# Altium PCB Sampler_DIOT.PCBDOC (part 4 of 9)
Units mm, origin at the board's own origin, x right, y up, seen from the top; angles counter-clockwise.
Board outline 222.17 x 100 mm, 4 copper layers (Top, GP1(GND), L3, Bot), stack 1.672 mm thick; 664 components, 411 nets, 2128 pads, 911 vias.
Unrouted connection lines stored in the file: 4.
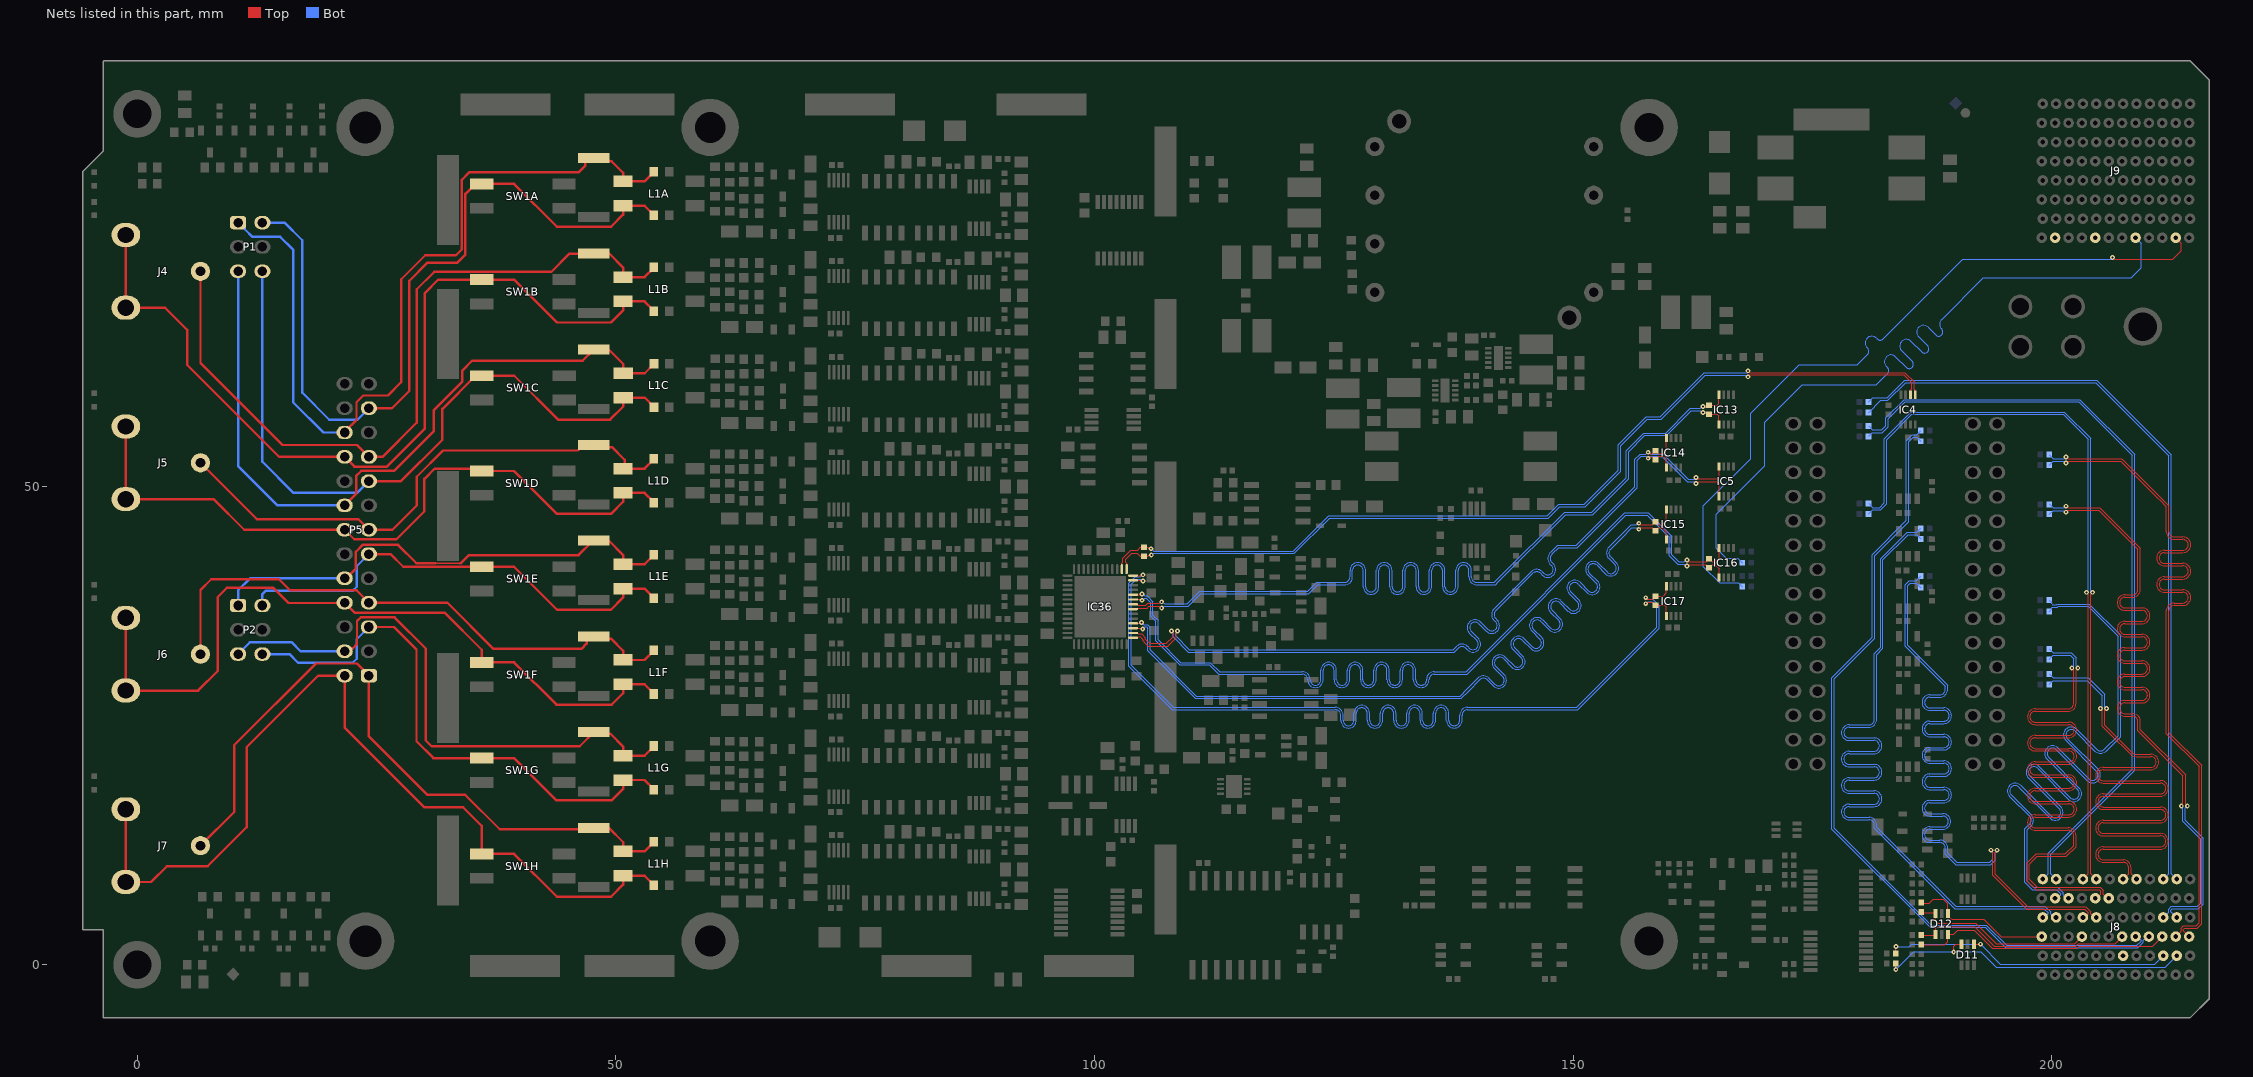
[diagram p5: the nets of this part, all layers, seen from the top]

## Part data (continued)
R101: library part R0402_220R_1%_0.0625W_100PPM, "Resistor - 1%", Case=0402, Manufacturer=GENERIC, Manufacturer1 ComponentHeight=0.4mm, Manufacturer1 Example="YAGEO PHYCOMP", Manufacturer1 Part Number=232270672201L, Power=0.0625W, Tolerance=±1%, Author="CERN DEM JLC", Component Type=Standard, CreateDate=03.12.2007, HelpURL=\\cern.ch\dfs\Applications\Altium\Datasheets\R0402_Phycomp_RC0402.pdf, LatestRevisionDate=17.10.2012, Manufacturer Part Number=R0402_220R_1%_0.0625W_100PPM, Mounted=Yes, Part Description="General Purpose Thick Film Chip Resistor", Part Number=R0402_220R_1%_0.0625W_100PPM, Pin Count=2, PressFit=No, Sense=No, SMD=Yes, Socket=No, Status="Not Recommended", TC=±100ppm/°C
R114: library part R0402_1K6_1%_0.0625W_100PPM, "Resistor - 1%", Case=0402, Manufacturer=GENERIC, Manufacturer1 ComponentHeight=0.4mm, Manufacturer1 Example="YAGEO PHYCOMP", Manufacturer1 Part Number=232270671602L, Power=0.0625W, Tolerance=±1%, Author="CERN DEM JLC", Component Type=Standard, CreateDate=03.12.2007, HelpURL=\\cern.ch\dfs\Applications\Altium\Datasheets\R0402_Phycomp_RC0402.pdf, LatestRevisionDate=17.10.2012, Manufacturer Part Number=R0402_1K6_1%_0.0625W_100PPM, Mounted=Yes, Part Description="General Purpose Thick Film Chip Resistor", Part Number=R0402_1K6_1%_0.0625W_100PPM, Pin Count=2, PressFit=No, Sense=No, SMD=Yes, Socket=No, Status="Not Recommended", TC=±100ppm/°C
R119: library part R0402_1K_1%_0.0625W_100PPM, "Resistor - 1%", Case=0402, Manufacturer=GENERIC, Manufacturer1 ComponentHeight=0.4mm, Manufacturer1 Example="YAGEO PHYCOMP", Manufacturer1 Part Number=232270671002L, Power=0.0625W, Tolerance=±1%, Author="CERN DEM JLC", Component Type=Standard, CreateDate=03.12.2007, HelpURL=\\cern.ch\dfs\Applications\Altium\Datasheets\R0402_Phycomp_RC0402.pdf, LatestRevisionDate=17.10.2012, Manufacturer Part Number=R0402_1K_1%_0.0625W_100PPM, Mounted=Yes, Part Description="General Purpose Thick Film Chip Resistor", Part Number=R0402_1K_1%_0.0625W_100PPM, Pin Count=2, PressFit=No, Sense=No, SMD=Yes, Socket=No, Status="Not Recommended", TC=±100ppm/°C
RN1A RN1B RN1C RN1D RN1E RN1F RN1G RN1H RN2A RN2B RN2C RN2D RN2E RN2F RN2G RN2H RN3 RN4: library part RN_10K_5K_VISHAY_AORN2-1AT3, "DIL8 Resistor Network 4 Resistors 10k-5k-5k-10k 0.1%", Case=SOIC8, Manufacturer="VISHAY DALE", Manufacturer Part Number=AORN2-1AT3, Power=4x0.1W, Tolerance=0.1%, Author="CERN DEM JLC", ComponentHeight=1.73mm, Component Type=Standard, CreateDate=20.02.2017, HelpURL=\\cern.ch\dfs\Applications\Altium\Datasheets\RN_VISHAY_AORN.pdf, LatestRevisionDate=20.02.2017, Mounted=Yes, Part Description="Dual-In-Line Thin Film Precision Automotive Resistors Network, (4 Isolated) - AORN Series", Part Number=RN_10K_5K_VISHAY_AORN2-1AT3, Pin Count=8, PressFit=No, Sense=No, SMD=Yes, Socket=No, TC=±25ppm/°C
SCREW1 SCREW2: library part BOSSARD_BN5687-3061606_v, "Screw", Manufacturer=BOSSARD, Manufacturer Part Number="BN5687 Art.3061606", Author="CERN DEM JLC", Component Type=Mechanical, ComponentHeight=2.4mm, CreateDate=07.02.2013, HelpURL=\\cern.ch\dfs\Applications\Altium\Datasheets\BOSSARD_BN5687-3061606.pdf, LatestRevisionDate=07.02.2013, Mounted=Yes, PackageDescription="M3 L=8mm Hexalobular Socket Pan Head Screw, Fully Threaded - Stainless Steel A2", Part Description="M3 L=8mm Hexalobular Socket Pan Head Screw, Fully Threaded, Stainless Steel A2", Part Number=BOSSARD_BN5687-3061606_v, Pin Count=0, PressFit=No, Sense=No, SMD=No, Socket=No, Status=None
Standoff1 Standoff2: library part SAMTEC_SO-1115-03-02-02-N, "Standoff Male-Female", Manufacturer=SAMTEC, Manufacturer Part Number=SO-1115-03-02-02-N, Author="CERN DEM BC", Component Type=Mechanical, ComponentHeight=11.15mm, CreateDate=21.07.2020, HelpURL=\\cern.ch\dfs\Applications\Altium\Datasheets\SAMTEC_SO-1115-03-02-02-N.pdf, LatestRevisionDate=21.07.2020, Mounted=Yes, PackageDescription="11.15mm Length, Precision Board Stacking Standoff M3 Male/Female", Part Description="11.15mm Length, Precision Board Stacking Standoff M3 Male/Female", Part Number=SAMTEC_SO-1115-03-02-02-N, Pin Count=1, PressFit=No, Sense=No, SMD=No, Socket=No, Status=None
SW1A SW1B SW1C SW1D SW1E SW1F SW1G SW1H: library part SW_CTS_204-121ST, "2x SPST DIP Switch 1NO + 1NF", Manufacturer=CTS, Manufacturer Part Number=204-121ST, Author="CERN DEM JLC", ComponentHeight=10.36mm, Component Type=Standard, CreateDate=28.08.2014, Family=Switch, HelpURL=\\cern.ch\dfs\Applications\Altium\Datasheets\SW_CTS_204-121ST.pdf, LatestRevisionDate=28.08.2014, Mounted=Yes, PackageDescription="Body 7.26 x 9.78mm, 2x SPST DIP, 1NO + 1NF Switch, CTS 204 Series", Part Description="Coupled SPST DIP Switch, 1NO + 1NF, CTS 204 Series", Part Number=SW_CTS_204-121ST, Pin Count=4, PressFit=No, Sense=No, SMD=Yes, Socket=No, Status=None
T10 T11: "N-CHANNEL MOSFET WITH DIODE", Case=SOT23-3, Manufacturer="ON SEMICONDUCTOR", Manufacturer Part Number=BSS138L, Author="CERN DEM JLC", Bonding=No, Component Type=Standard, ComponentHeight=1.11mm, CreateDate=23.03.2009, Device=BSS138LT1G, HelpURL=\\cern.ch\dfs\Applications\Altium\Datasheets\BSS138LT1G.pdf, LatestRevisionDate=25.05.2022, Mounted=Yes, PackageDescription="SOT23, 0.95mm Pitch; 3 Pin, 1.40mm W X 3.00mm L X 1.10mm H body, IPC Medium Density", Part Description="50V, 200mA N-Channel Enhancement Mode Field-Effect Transistor", Part Number=BSS138LT1G, Pin Count=3, PressFit=No, Sense=No, SMD=Yes, Socket=No
TP7 TP8 TP9 TP10 TP11 TP12 TP13: library part SMD_PAD_1.27X1.27MM, Author="CERN DEM JLC", ComponentHeight=0mm, Component Type="Standard (No BOM)", CreateDate=12.01.2008, Family="Test Point", HelpURL=Undefined, LatestRevisionDate=12.01.2008, Mounted=No, PackageDescription="1.27mm x 1.27mm PCB Copper Area (SMD Test Point)", Part Description="1.27mm x 1.27mm PCB Copper Area (SMD Test Point)", Part Number=SMD_PAD_1.27X1.27MM, Pin Count=1, Sense=No, SMD=Yes, Socket=No, Status=None
TP14 TP15: library part SMD_PAD_1.27X1.27MM, "Test Point", Author="CERN DEM JLC", Component Type="Standard (No BOM)", ComponentHeight=0mm, CreateDate=12.01.2008, Family="Test Point", HelpURL=Undefined, LatestRevisionDate=12.01.2008, Mounted=No, PackageDescription="1.27mm x 1.27mm PCB Copper Area (SMD Test Point)", Part Description="1.27mm x 1.27mm PCB Copper Area (SMD Test Point)", Part Number=SMD_PAD_1.27X1.27MM, Pin Count=1, Sense=No, SMD=Yes, Socket=No, Status=None
WASHER1 WASHER2 WASHER3 WASHER4: library part BOSSARD_BN678-1250191_v, "Washer", Manufacturer=BOSSARD, Manufacturer Part Number="BN678 Art.1250191", Author="CERN DEM JLC", Component Type=Mechanical, ComponentHeight=0.5mm, CreateDate=15.01.2013, HelpURL=\\cern.ch\dfs\Applications\Altium\Datasheets\BOSSARD_BN678-1250191.pdf, LatestRevisionDate=11.12.2013, Mounted=Yes, PackageDescription="Waved Spring Washer for M3 Screw, Stainless Steel A2 / 1.4310", Part Description="Waved Spring Washer for M3 Screw, Stainless Steel A2 / 1.4310", Part Number=BOSSARD_BN678-1250191_v, Pin Count=0, PressFit=No, Sense=No, SMD=No, Socket=No, Status=Obsolete, Status Comment="Replaced by BOSSARD_BN83728-8243964_v"

## Free pads (board coordinates)
  round 6 hole 3.2: MH(59.844,2.48) MH(59.844,87.48)

## Via types
v1: diameter 0.5, hole 0.2, Top to Bot, tented both sides, 878 vias
v2: diameter 1, hole 0.6, Top to Bot, tented both sides, 18 vias
v3: diameter 0.6, hole 0.3, Top to Bot, tented both sides, 13 vias
v4: diameter 1.27, hole 0.711, Top to Bot, tented both sides, 2 vias

## Nets (pads, with @x,y where several pads share a name; then routed paths per layer and width w, separated by ;. In a path a pad name is that pad's centre, name@x,y a point inside that pad or via, vN(x,y) a via of type N, cw(c..) or ccw(c..) an arc to the next point about the centre after c; other vN are vias at no path point)
ADC_CLKOUT_N: IC13.8 IC36.34 R20.2 | length 95.4
  Top w0.127: IC36.34@104.039,37.665 104.465,37.665 104.563,37.568 105.366,37.568 105.546,37.748 106.756,37.748 106.93,37.921 v1(107.019,37.921) ; v1(163.569,58.318) 164.054,58.318 R20.2@164.21,58.474 165.069,58.474 165.229,58.634 IC13.8@165.229,59.529
  Bot w0.127: v1(107.019,37.921) 107.108,37.921 107.33,37.7 109.691,37.7 111.013,39.023 122.274,39.023 123.206,39.954 125.944,39.954 126.135,39.954 ccw(c126.135,40.518) 126.698,40.518 126.698,41.199 cw(c127.516,41.199) 127.516,42.016 cw(c127.516,41.199) 128.333,41.199 128.333,39.518 ccw(c128.897,39.518) 128.897,38.954 ccw(c128.897,39.518) 129.46,39.518 129.46,41.199 cw(c130.278,41.199) 130.278,42.016 cw(c130.278,41.199) 131.095,41.199 131.095,39.518 ccw(c131.659,39.518) 131.659,38.954 ccw(c131.659,39.518) 132.222,39.518 132.222,41.199 cw(c133.04,41.199) 133.04,42.016 cw(c133.04,41.199) 133.857,41.199 133.857,39.518 ccw(c134.421,39.518) 134.421,38.954 ccw(c134.421,39.518) 134.984,39.518 134.984,41.199 cw(c135.802,41.199) 135.802,42.016 cw(c135.802,41.199) 136.619,41.199 136.619,39.518 ccw(c137.183,39.518) 137.183,38.954 ccw(c137.183,39.518) 137.746,39.518 137.746,41.199 cw(c138.564,41.199) 138.564,42.016 cw(c138.564,41.199) 139.381,41.199 139.381,40.518 ccw(c139.945,40.518) 139.945,39.954 141.795,39.954 142.15,40.309 149.112,47.271 151.937,47.271 155.571,50.905 155.571,53.73 157.395,55.554 159.67,55.554 162.245,58.129 163.304,58.129 163.493,58.318 v1(163.569,58.318)
ADC_CLKOUT_P: IC13.1 IC36.33 R20.1 | length 95.4
  Top w0.127: IC36.33@104.039,37.165 104.465,37.165 104.563,37.263 105.492,37.263 105.672,37.443 106.756,37.443 106.93,37.269 v1(107.019,37.269) ; v1(163.569,57.691) 164.054,57.691 R20.1@164.21,57.534 165.054,57.534 165.25,57.338 IC13.1@165.25,56.45
  Bot w0.127: v1(107.019,37.269) 107.108,37.269 107.285,37.446 109.796,37.446 111.119,38.769 122.38,38.769 123.311,39.7 125.944,39.7 126.135,39.7 ccw(c126.135,40.518) 126.952,40.518 126.952,41.199 cw(c127.516,41.199) 127.516,41.762 cw(c127.516,41.199) 128.079,41.199 128.079,39.518 ccw(c128.897,39.518) 128.897,38.7 ccw(c128.897,39.518) 129.714,39.518 129.714,41.199 cw(c130.278,41.199) 130.278,41.762 cw(c130.278,41.199) 130.841,41.199 130.841,39.518 ccw(c131.659,39.518) 131.659,38.7 ccw(c131.659,39.518) 132.476,39.518 132.476,41.199 cw(c133.04,41.199) 133.04,41.762 cw(c133.04,41.199) 133.603,41.199 133.603,39.518 ccw(c134.421,39.518) 134.421,38.7 ccw(c134.421,39.518) 135.238,39.518 135.238,41.199 cw(c135.802,41.199) 135.802,41.762 cw(c135.802,41.199) 136.365,41.199 136.365,39.518 ccw(c137.183,39.518) 137.183,38.7 ccw(c137.183,39.518) 138,39.518 138,41.199 cw(c138.564,41.199) 138.564,41.762 cw(c138.564,41.199) 139.127,41.199 139.127,40.518 ccw(c139.945,40.518) 139.945,39.7 141.9,39.7 142.15,39.95 149.217,47.017 152.042,47.017 155.825,50.8 155.825,53.625 157.5,55.3 159.775,55.3 162.35,57.875 163.308,57.875 163.493,57.691 v1(163.569,57.691)
ADC_IN_N0: L1A.2 P1.2 P5.23 R8A.1 SW1A.1 | length 83.1
  Top w0.254: P5.23@24.2,58.15 26.6,58.15 28.419,59.969 28.419,71.463 30.316,73.36 33.44,73.36 34.276,74.196 34.276,80.535 35.331,81.59 39.366,81.59 43.826,77.13 49.517,77.13 50.76,78.373 L1A.2@50.76,79.304 52.998,79.304 53.964,78.338 R8A.1@53.964,78.288
  Bot w0.254: P1.2@13.07,77.54 15.377,77.54 17.225,75.692 17.225,59.775 20.05,56.95 23,56.95 P5.23@24.2,58.15
ADC_IN_N1: J4.2 L1B.2 P5.20 R8B.1 SW1B.1 | length 91.9
  Top w0.254: J4.2@-1.2,76.25 J4.2@-1.2,68.65 2.902,68.65 5.207,66.345 5.207,62.687 14.824,53.07 P5.20@21.66,53.07 22.68,52.05 26.075,52.05 30.044,56.019 30.044,70.18 31.444,71.58 35.403,71.58 35.413,71.59 39.366,71.59 43.851,67.105 49.492,67.105 50.76,68.373 L1B.2@50.76,69.304 52.998,69.304 53.964,68.338 R8B.1@53.964,68.288
ADC_IN_N2: L1C.2 P1.6 P5.17 R8C.1 SW1C.1 | length 73
  Top w0.254: P5.17@24.2,50.53 27.545,50.53 31.869,54.854 31.869,58.071 35.344,61.546 39.379,61.546 43.97,56.955 49.398,56.955 50.773,58.329 L1C.2@50.773,59.26 53.011,59.26 53.977,58.294 R8C.1@53.977,58.244
  Bot w0.254: P1.6@13.07,72.46 13.07,52.555 16.325,49.3 22.97,49.3 P5.17@24.2,50.53
ADC_IN_N3: J5.2 L1D.2 P5.14 R8D.1 SW1D.1 | length 73.4
  Top w0.246: 31.185,51.83 33.703,51.83
  Top w0.254: J5.2@-1.2,56.25 J5.2@-1.2,48.65 7.967,48.65 11.167,45.45 21.671,45.45 22.663,44.458 27.072,44.458 29.992,47.378 29.992,50.765 31.057,51.83 31.185,51.83 ; 33.703,51.83 35.173,51.83 35.413,51.59 39.366,51.59 43.851,47.105 49.492,47.105 50.76,48.373 L1D.2@50.76,49.304 52.998,49.304 53.964,48.338 R8D.1@53.964,48.288
ADC_IN_N4: L1E.2 P2.2 P5.11 R8E.1 SW1E.1 | length 49.4
  Top w0.254: P5.11@24.2,42.91 26.465,42.91 27.785,41.59 SW1E.1@35.986,41.59 39.366,41.59 43.876,37.08 49.467,37.08 50.76,38.373 L1E.2@50.76,39.304 52.998,39.304 53.964,38.338 R8E.1@53.964,38.288
  Bot w0.254: P2.2@13.07,37.54 13.07,38.72 13.45,39.1 22.525,39.1 22.925,39.5 22.925,41.635 P5.11@24.2,42.91
ADC_IN_N5: J6.2 L1F.2 P5.8 R8F.1 SW1F.1 | length 79.5
  Top w0.254: J6.2@-1.2,36.25 J6.2@-1.2,28.65 6.352,28.65 8.4,30.698 8.4,38.425 9.35,39.375 14.213,39.375 15.788,37.8 21.63,37.8 P5.8@21.66,37.83 22.69,36.8 32.099,36.8 35.986,32.913 SW1F.1@35.986,31.59 39.366,31.59 43.776,27.18 49.567,27.18 50.76,28.373 L1F.2@50.76,29.304 52.998,29.304 53.964,28.338 R8F.1@53.964,28.288
ADC_IN_N6: L1G.2 P2.6 P5.5 R8G.1 SW1G.1 | length 59.5
  Top w0.254: P5.5@23.7,35.29 26.835,35.29 29.17,32.955 29.17,23.355 30.935,21.59 39.366,21.59 43.751,17.205 49.592,17.205 50.76,18.373 L1G.2@50.76,19.304 52.998,19.304 53.964,18.338 R8G.1@53.964,18.288
  Bot w0.254: P2.6@13.07,32.46 15.89,32.46 16.8,31.55 22.5,31.55 22.925,31.975 22.925,34.015 P5.5@24.2,35.29
ADC_IN_N7: J7.2 L1H.2 P5.2 R8H.1 SW1H.1 | length 92.9
  Top w0.254: J7.2@-1.2,16.25 J7.2@-1.2,8.65 1.436,8.65 3.086,10.3 7.35,10.3 11.425,14.375 11.425,22.725 18.91,30.21 P5.2@21.66,30.21 21.66,24.79 30,16.45 34.05,16.45 35.986,14.514 SW1H.1@35.986,11.59 39.366,11.59 43.826,7.13 49.517,7.13 50.76,8.373 L1H.2@50.76,9.304 52.998,9.304 53.964,8.338 R8H.1@53.964,8.288
ADC_IN_P0: L1A.1 P1.1 P5.22 R1A.1 R5A.2 | length 87.8
  Top w0.254: P5.22@21.66,55.61 21.66,55.688 22.899,56.927 22.899,58.773 23.602,59.476 26.179,59.476 27.581,60.878 27.581,71.629 30.081,74.129 33.291,74.129 33.895,74.733 33.895,82.01 34.67,82.785 46.102,82.785 46.814,83.497 46.814,83.907 47.212,84.305 49.019,84.305 49.199,84.125 49.199,83.973 49.217,83.954 49.549,83.954 50.76,82.743 L1A.1@50.76,81.844 52.998,81.844 53.964,82.81 R1A.1@53.964,82.86
  Bot w0.254: P1.1@10.53,77.54 10.559,77.54 11.218,76.881 11.218,76.852 12.02,76.05 14.94,76.05 16.275,74.715 16.275,58.775 19.44,55.61 P5.22@21.66,55.61
ADC_IN_P1: J4.1 L1B.1 P5.19 R1B.1 R5B.2 | length 80.1
  Top w0.254: J4.1@6.6,72.45 6.6,62.875 15.17,54.305 22.965,54.305 P5.19@24.2,53.07 25.63,53.07 29.2,56.64 29.2,70.575 31.034,72.409 43.258,72.409 45.154,74.305 47.544,74.305 47.619,74.23 R5B.2@47.694,74.305 49.302,74.305 50.76,72.847 L1B.1@50.76,71.844 52.998,71.844 53.964,72.81 R1B.1@53.964,72.86
ADC_IN_P2: L1C.1 P1.5 P5.16 R1C.1 R5C.2 | length 77.3
  Top w0.254: P5.16@21.66,47.99 22.863,49.193 22.863,51.063 23.4,51.6 26.833,51.6 30.95,55.717 30.95,57.922 33.958,60.93 33.958,62.089 34.974,63.105 46.529,63.105 47.654,64.23 47.665,64.219 R5C.2@47.707,64.261 49.271,64.261 50.769,62.763 50.769,61.804 L1C.1@50.773,61.8 53.011,61.8 53.977,62.766 R1C.1@53.977,62.816
  Bot w0.254: P1.5@10.53,72.46 10.53,52.12 14.66,47.99 P5.16@21.66,47.99
ADC_IN_P3: J5.1 L1D.1 P5.13 R1D.1 R5D.2 | length 57.9
  Top w0.254: J5.1@6.6,52.45 12.5,46.55 23.1,46.55 P5.13@24.2,45.45 26.653,45.45 29.2,47.997 29.2,50.986 31.944,53.73 46.022,53.73 46.171,53.879 46.171,53.907 46.569,54.305 R5D.2@47.694,54.305 47.913,54.086 49.576,54.086 50.919,52.743 50.919,52.003 L1D.1@50.76,51.844 52.998,51.844 53.964,52.81 R1D.1@53.964,52.86
ADC_IN_P4: L1E.1 P2.1 P5.10 R1E.1 R5E.2 | length 51.8
  Top w0.165: 31.144,41.971 33.744,41.971
  Top w0.254: P5.10@21.66,40.37 21.795,40.37 22.83,41.405 22.83,43.156 23.538,43.864 27.246,43.864 29.139,41.971 31.144,41.971 ; 33.744,41.971 33.807,41.971 34.643,42.807 46.112,42.807 47.61,44.305 47.652,44.263 R5E.2@47.694,44.305 49.262,44.305 50.76,42.807 L1E.1@50.76,41.844 52.998,41.844 53.964,42.81 R1E.1@53.964,42.86
  Bot w0.254: P2.1@10.53,37.54 10.53,39.13 11.77,40.37 P5.10@21.66,40.37
ADC_IN_P5: J6.1 L1F.1 P5.7 R1F.1 R5F.2 | length 60.3
  Top w0.254: J6.1@6.6,32.45 6.6,39.15 7.725,40.275 14.8,40.275 15.95,39.125 22.905,39.125 P5.7@24.2,37.83 32.395,37.83 37.217,33.008 46.397,33.008 46.937,33.548 46.937,33.907 47.335,34.305 47.514,34.305 47.776,34.043 49.524,34.043 50.76,32.807 L1F.1@50.76,31.844 52.998,31.844 53.964,32.81 R1F.1@53.964,32.86
ADC_IN_P6: L1G.1 P2.5 P5.4 R1G.1 R5G.2 | length 60.9
  Top w0.254: P5.4@21.66,32.75 22.12,32.75 22.435,33.065 22.516,33.065 22.95,33.5 22.95,35.9 23.35,36.3 26.875,36.3 30.13,33.045 30.13,23.445 30.739,22.836 46.225,22.836 R5G.2@47.694,24.305 ; R5G.2@47.669,24.142 49.425,24.142 50.76,22.807 50.76,21.978 50.894,21.844 52.998,21.844 53.964,22.81 R1G.1@53.964,22.86
  Bot w0.254: P2.5@10.53,32.46 11.745,33.675 16.15,33.675 17.075,32.75 P5.4@21.66,32.75
ADC_IN_P7: J7.1 L1H.1 P5.1 R1H.1 R5H.2 | length 72.3
  Top w0.254: J7.1@6.6,12.45 10.125,15.975 10.125,22.95 18.65,31.475 22.935,31.475 23.615,30.795 23.615,30.766 24.171,30.21 P5.1@24.2,30.21 24.2,23.85 30.3,17.75 34.266,17.75 37.861,14.155 R5H.2@47.694,14.155 ; R5H.2@47.694,14.305 49.271,14.305 50.769,12.807 50.769,11.853 L1H.1@50.76,11.844 52.998,11.844 53.964,12.81 R1H.1@53.964,12.86
ADC_SCK_N: IC4.5 IC36.42 R79.1 | length 95.8
  Top w0.127: IC36.42@102.864,41.34 102.864,41.942 102.962,42.039 102.962,42.492 103.778,43.308 104.516,43.308 104.808,43.6 R79.1@105.194,43.6 105.58,43.6 105.711,43.469 v1(105.917,43.469) ; v1(168.275,62.052) 168.448,61.879 177.351,61.879 184.671,61.879 185.654,60.896 185.654,60.134 185.75,60.039 IC4.5@185.75,59.55
  Bot w0.127: v1(105.917,43.469) 105.979,43.469 106.219,43.229 120.769,43.229 124.469,46.929 147.295,46.929 148.486,48.12 151.161,48.12 154.721,51.68 154.721,54.355 157.641,57.275 159.1,57.275 160.825,59 163.691,61.865 168.275,61.865 v1(168.275,62.052)
ADC_SCK_P: IC4.6 IC36.41 R79.2 | length 94.9
  Top w0.127: IC36.41@103.364,41.34 103.364,41.942 103.266,42.039 103.266,42.365 103.904,43.003 104.465,43.003 104.808,42.66 R79.2@105.194,42.66 105.58,42.66 105.737,42.817 v1(105.944,42.817) ; v1(168.275,61.425) 168.275,61.611 168.457,61.611 168.471,61.625 177.246,61.625 184.566,61.625 185.4,60.791 185.4,60.189 185.25,60.039 IC4.6@185.25,59.55
  Bot w0.127: v1(105.944,42.817) 106.006,42.817 106.164,42.975 120.874,42.975 124.574,46.675 147.4,46.675 148.591,47.866 151.266,47.866 154.975,51.575 154.975,54.25 157.746,57.021 159.205,57.021 163.796,61.611 168.089,61.611 v1(168.275,61.425)
ADC_SDOA_N: IC5.1 IC14.1 IC36.28 R21.1 | length 88.2
  Top w0.127: IC36.28@104.039,34.665 104.465,34.665 104.563,34.568 104.919,34.568 105.326,34.161 105.326,34.018 105.764,33.58 107.52,33.58 108.219,34.279 108.219,34.68 108.058,34.841 v1(108.058,34.879) ; v1(157.85,52.923) 158.025,53.098 158.282,53.098 R21.1@158.6,52.78 158.929,53.109 159.44,53.109 159.75,52.8 IC14.1@159.75,51.95 ; v1(162.85,50.275) 162.85,50.411 163.054,50.411 163.108,50.465 165.089,50.465 165.255,50.299 165.255,48.955 IC5.1@165.25,48.95
  Bot w0.127: v1(108.058,34.879) 108.058,34.804 108.244,34.618 108.244,34.249 109.822,32.671 137.024,32.671 137.596,32.671 138.005,33.08 cw(c138.403,32.681) 138.802,33.079 138.972,32.91 ccw(c139.55,33.488) 140.128,32.91 ccw(c139.55,33.488) 140.128,34.066 139.361,34.833 cw(c139.759,35.231) 139.361,35.63 cw(c139.759,35.231) 140.158,35.63 140.925,34.863 ccw(c141.503,35.441) 142.081,34.863 ccw(c141.503,35.441) 142.081,36.019 141.911,36.189 cw(c142.309,36.587) 141.911,36.986 145.817,40.892 cw(c146.215,40.493) 146.614,40.891 146.784,40.722 ccw(c147.362,41.3) 147.94,40.722 ccw(c147.362,41.3) 147.94,41.878 147.77,42.048 cw(c148.168,42.446) 147.77,42.845 147.905,42.98 148.52,43.595 150.445,43.595 156.7,49.85 156.7,52.7 157.11,53.11 157.589,53.11 157.776,52.923 v1(157.85,52.923) 157.927,52.923 157.927,52.925 158.111,53.11 159.093,53.11 159.1,53.103 159.297,53.103 161.939,50.461 162.663,50.461 v1(162.85,50.275)
ADC_SDOA_P: IC5.8 IC14.8 IC36.27 R21.2 | length 88.5
  Top w0.127: IC36.27@104.039,34.165 104.465,34.165 104.563,34.263 104.793,34.263 105.021,34.035 105.021,33.892 105.258,33.655 105.638,33.275 107.646,33.275 108.524,34.153 108.524,34.68 108.685,34.841 v1(108.685,34.879) ; v1(157.85,53.55) 157.998,53.402 158.282,53.402 R21.2@158.6,53.72 158.906,53.414 159.434,53.414 159.75,53.73 IC14.8@159.75,55.05 ; v1(162.85,50.902) 162.982,50.77 165.089,50.77 165.255,50.936 165.255,52.045 IC5.8@165.25,52.05
  Bot w0.127: v1(108.685,34.879) 108.685,34.804 108.498,34.618 108.498,34.354 109.927,32.925 136.77,32.925 137.491,32.925 137.825,33.259 cw(c138.403,32.681) 138.941,33.296 138.944,33.296 138.98,33.26 cw(c138.403,32.681) 138.981,33.259 139.151,33.089 ccw(c139.55,33.488) 139.948,33.089 ccw(c139.55,33.488) 139.948,33.886 139.181,34.653 cw(c139.759,35.231) 139.181,35.809 cw(c139.759,35.231) 140.337,35.809 141.104,35.042 ccw(c141.503,35.441) 141.901,35.042 ccw(c141.503,35.441) 141.901,35.839 141.731,36.009 cw(c142.309,36.587) 141.731,37.165 145.637,41.071 cw(c146.215,40.493) 146.754,41.109 146.756,41.109 146.792,41.072 cw(c146.215,40.493) 146.793,41.071 146.963,40.901 ccw(c147.362,41.3) 147.76,40.901 ccw(c147.362,41.3) 147.76,41.698 147.59,41.868 cw(c148.168,42.446) 147.59,43.024 147.725,43.159 148.414,43.849 150.339,43.849 156.446,49.955 156.446,52.805 157.004,53.364 157.589,53.364 157.776,53.55 v1(157.85,53.55) 157.927,53.55 157.927,53.548 158.111,53.364 159.198,53.364 159.205,53.357 159.402,53.357 162.044,50.715 162.85,50.715 v1(162.85,50.902)
ADC_SDOB_N: IC15.8 IC36.30 R22.2 | length 97
  Top w0.127: IC36.30@104.039,35.665 104.968,35.665 104.924,35.709 v1(104.924,35.757) ; v1(156.875,46.133) 157.036,45.972 158.282,45.972 R22.2@158.6,46.29 158.918,45.972 159.322,45.972 159.75,46.4 IC15.8@159.75,47.55
  Bot w0.127: v1(104.924,35.757) 105.131,35.55 105.549,35.55 105.829,35.27 105.829,32.896 110.644,28.081 138.206,28.081 138.953,28.828 140.064,29.939 cw(c140.642,29.361) 141.18,29.976 141.183,29.976 141.219,29.94 cw(c140.642,29.361) 141.22,29.939 141.839,29.32 ccw(c142.237,29.719) 142.636,29.32 ccw(c142.237,29.719) 142.636,30.117 141.775,30.978 cw(c142.353,31.556) 141.775,32.134 cw(c142.353,31.556) 142.931,32.134 143.792,31.273 ccw(c144.19,31.672) 144.589,31.273 ccw(c144.19,31.672) 144.589,32.07 143.728,32.931 cw(c144.306,33.509) 143.728,34.087 cw(c144.306,33.509) 144.884,34.087 145.745,33.226 ccw(c146.143,33.625) 146.542,33.226 ccw(c146.143,33.625) 146.542,34.023 145.681,34.884 cw(c146.259,35.462) 145.681,36.04 cw(c146.259,35.462) 146.837,36.04 147.698,35.179 ccw(c148.096,35.578) 148.495,35.179 ccw(c148.096,35.578) 148.495,35.976 147.634,36.837 cw(c148.212,37.415) 147.634,37.993 cw(c148.212,37.415) 148.79,37.993 149.651,37.132 ccw(c150.049,37.531) 150.448,37.132 ccw(c150.049,37.531) 150.448,37.929 149.587,38.79 cw(c150.165,39.368) 149.587,39.946 cw(c150.165,39.368) 150.743,39.946 151.604,39.085 ccw(c152.002,39.484) 152.401,39.882 151.54,40.743 cw(c152.118,41.321) 151.54,41.899 cw(c152.118,41.321) 152.696,41.899 153.557,41.038 ccw(c153.955,41.437) 154.354,41.038 ccw(c153.955,41.437) 154.354,41.835 153.735,42.454 cw(c154.313,43.032) 153.735,43.61 154.938,44.812 156.097,45.972 156.614,45.972 156.775,46.133 v1(156.875,46.133)
ADC_SDOB_P: IC15.1 IC36.29 R22.1 | length 96.5
  Top w0.127: IC36.29@104.039,35.165 104.968,35.165 v1(105.044,35.089) ; v1(156.875,45.506) 157.036,45.668 158.282,45.668 R22.1@158.6,45.35 158.918,45.668 159.333,45.668 159.75,45.25 IC15.1@159.75,44.45
  Bot w0.127: v1(105.044,35.089) 105.251,35.296 105.444,35.296 105.575,35.165 105.575,32.791 110.539,27.827 138.311,27.827 139.132,28.648 140.244,29.759 cw(c140.642,29.361) 141.041,29.759 ; 141.041,29.759 141.659,29.141 ccw(c142.237,29.719) 142.815,29.141 ccw(c142.237,29.719) 142.815,30.297 141.954,31.158 cw(c142.353,31.556) 141.954,31.955 cw(c142.353,31.556) 142.751,31.955 143.612,31.094 ccw(c144.19,31.672) 144.768,31.094 ccw(c144.19,31.672) 144.768,32.25 143.907,33.111 cw(c144.306,33.509) 143.907,33.908 cw(c144.306,33.509) 144.704,33.908 145.565,33.047 ccw(c146.143,33.625) 146.721,33.047 ccw(c146.143,33.625) 146.721,34.203 145.86,35.064 cw(c146.259,35.462) 145.86,35.861 cw(c146.259,35.462) 146.657,35.861 147.518,35 ccw(c148.096,35.578) 148.674,35 ccw(c148.096,35.578) 148.674,36.156 147.813,37.017 ; 147.813,37.017 cw(c148.212,37.415) 147.813,37.814 cw(c148.212,37.415) 148.61,37.814 149.471,36.953 ccw(c150.049,37.531) 150.627,36.953 ccw(c150.049,37.531) 150.627,38.109 149.766,38.97 cw(c150.165,39.368) 149.766,39.767 cw(c150.165,39.368) 150.563,39.767 151.424,38.906 ccw(c152.002,39.484) 152.58,38.906 ccw(c152.002,39.484) 152.58,40.062 151.719,40.923 cw(c152.118,41.321) 151.719,41.72 cw(c152.118,41.321) 152.516,41.72 153.377,40.859 ccw(c153.955,41.437) 154.533,40.859 ccw(c153.955,41.437) 154.533,42.015 153.915,42.634 cw(c154.313,43.032) 153.915,43.43 155.117,44.633 156.152,45.668 156.614,45.668 156.775,45.506 v1(156.875,45.506)
ADC_SDOC_N: IC16.8 IC36.36 R23.2 | length 94.3
  Top w0.127: IC36.36@104.039,38.665 104.893,38.665 v1(104.969,38.742) ; v1(161.9,42.279) 162.061,42.118 163.909,42.118 R23.2@164.226,42.435 164.544,42.118 164.8,42.118 165.25,42.568 IC16.8@165.25,43.55
  Bot w0.127: v1(104.969,38.742) 105.031,38.742 105.23,38.542 105.498,38.542 106.113,37.928 106.113,36.512 106.643,35.982 106.643,33.943 109.007,31.579 112.118,31.579 113.073,30.625 120.136,30.625 121.707,30.625 cw(c121.707,29.807) 122.525,29.807 122.525,29.78 ccw(c123.088,29.78) 123.088,29.216 ccw(c123.088,29.78) 123.652,29.78 123.652,30.782 cw(c124.469,30.782) 124.469,31.599 cw(c124.469,30.782) 125.287,30.782 125.287,29.78 ccw(c125.85,29.78) 125.85,29.216 ccw(c125.85,29.78) 126.414,29.78 126.414,30.782 cw(c127.231,30.782) 127.231,31.599 cw(c127.231,30.782) 128.049,30.782 128.049,29.78 ccw(c128.612,29.78) 128.612,29.216 ccw(c128.612,29.78) 129.176,29.78 129.176,30.782 cw(c129.993,30.782) 129.993,31.599 cw(c129.993,30.782) 130.811,30.782 130.811,29.78 ccw(c131.374,29.78) 131.374,29.216 ccw(c131.374,29.78) 131.938,29.78 131.938,30.782 cw(c132.755,30.782) 132.755,31.599 cw(c132.755,30.782) 133.573,30.782 133.573,29.78 ccw(c134.136,29.78) 134.136,29.216 ccw(c134.136,29.78) 134.7,29.78 134.7,29.807 cw(c135.517,29.807) 135.517,30.625 137.375,30.625 138.826,30.625 155.407,47.205 157.854,47.205 160.302,44.757 160.302,42.857 161.067,42.092 161.639,42.092 161.826,42.279 v1(161.9,42.279)
ADC_SDOC_P: IC16.1 IC36.35 R23.1 | length 94.2
  Top w0.127: IC36.35@104.039,38.165 104.64,38.165 104.649,38.174 104.884,38.174 v1(104.969,38.089) ; v1(161.9,41.652) 162.061,41.813 163.909,41.813 R23.1@164.226,41.495 164.544,41.813 164.8,41.813 165.25,41.362 IC16.1@165.25,40.45
  Bot w0.127: v1(104.969,38.089) 105.031,38.089 105.23,38.288 105.393,38.288 105.859,37.823 105.859,36.407 106.389,35.877 106.389,33.837 108.902,31.325 112.013,31.325 112.968,30.371 120.136,30.371 121.707,30.371 cw(c121.707,29.807) 122.271,29.807 122.271,29.78 ccw(c123.088,29.78) 123.088,28.962 ccw(c123.088,29.78) 123.906,29.78 123.906,30.782 cw(c124.469,30.782) 124.469,31.345 cw(c124.469,30.782) 125.033,30.782 125.033,29.78 ccw(c125.85,29.78) 125.85,28.962 ccw(c125.85,29.78) 126.668,29.78 126.668,30.782 cw(c127.231,30.782) 127.231,31.345 cw(c127.231,30.782) 127.795,30.782 127.795,29.78 ccw(c128.612,29.78) 128.612,28.962 ccw(c128.612,29.78) 129.43,29.78 129.43,30.782 cw(c129.993,30.782) 129.993,31.345 cw(c129.993,30.782) 130.557,30.782 130.557,29.78 ccw(c131.374,29.78) 131.374,28.962 ccw(c131.374,29.78) 132.192,29.78 132.192,30.782 cw(c132.755,30.782) 132.755,31.345 cw(c132.755,30.782) 133.319,30.782 133.319,29.78 ccw(c134.136,29.78) 134.136,28.962 ccw(c134.136,29.78) 134.954,29.78 134.954,29.807 cw(c135.517,29.807) 135.517,30.371 137.375,30.371 138.932,30.371 155.512,46.951 157.749,46.951 160.048,44.652 160.048,42.752 160.962,41.838 161.639,41.838 161.826,41.652 v1(161.9,41.652)
ADC_SDOD_N: IC17.8 IC36.40 R24.2 | length 94.5
  Top w0.127: IC36.40@104.039,40.665 104.988,40.665 v1(105.064,40.742) ; v1(157.6,38.355) 157.6,38.268 157.675,38.193 158.282,38.193 R24.2@158.6,38.511 ; R24.2@158.671,38.511 159.409,38.511 159.75,38.852 IC17.8@159.75,39.55
  Bot w0.127: v1(105.064,40.742) 105.002,40.742 104.803,40.542 104.284,40.542 103.578,39.837 103.578,31.172 108.103,26.647 123.592,26.647 125.163,26.647 cw(c125.163,26.083) 125.727,26.083 125.727,25.548 ccw(c126.544,25.548) 126.544,24.73 ccw(c126.544,25.548) 127.362,25.548 127.362,26.284 cw(c127.925,26.284) 127.925,26.847 cw(c127.925,26.284) 128.489,26.284 128.489,25.548 ccw(c129.306,25.548) 129.306,24.73 ccw(c129.306,25.548) 130.124,25.548 130.124,26.284 cw(c130.687,26.284) 130.687,26.847 cw(c130.687,26.284) 131.251,26.284 131.251,25.548 ccw(c132.068,25.548) 132.068,24.73 ccw(c132.068,25.548) 132.886,25.548 132.886,26.284 cw(c133.449,26.284) 133.449,26.847 cw(c133.449,26.284) 134.013,26.284 134.013,25.548 ccw(c134.83,25.548) 134.83,24.73 ccw(c134.83,25.548) 135.648,25.548 135.648,26.284 cw(c136.211,26.284) 136.211,26.847 cw(c136.211,26.284) 136.775,26.284 136.775,25.548 ccw(c137.592,25.548) 137.592,24.73 ccw(c137.592,25.548) 138.41,25.548 138.41,26.083 cw(c138.973,26.083) 138.973,26.647 141.16,26.647 150.497,26.647 159.004,35.154 159.004,37.505 158.341,38.168 157.861,38.168 157.674,38.355 v1(157.6,38.355)
ADC_SDOD_P: IC17.1 IC36.39 R24.1 | length 93
  Top w0.127: IC36.39@104.039,40.165 104.988,40.165 v1(105.064,40.089) ; v1(157.6,37.728) 157.6,37.814 157.675,37.889 158.282,37.889 R24.1@158.6,37.571 ; R24.1@158.671,37.571 159.579,37.571 159.75,37.4 IC17.1@159.75,36.45
  Bot w0.127: v1(105.064,40.089) 105.002,40.089 104.803,40.288 104.389,40.288 103.832,39.732 103.832,31.277 108.209,26.901 123.592,26.901 125.163,26.901 cw(c125.163,26.083) 125.981,26.083 125.981,25.548 ccw(c126.544,25.548) 126.544,24.984 ccw(c126.544,25.548) 127.108,25.548 127.108,26.284 cw(c127.925,26.284) 127.925,27.101 cw(c127.925,26.284) 128.743,26.284 128.743,25.548 ccw(c129.306,25.548) 129.306,24.984 ccw(c129.306,25.548) 129.87,25.548 129.87,26.284 cw(c130.687,26.284) 130.687,27.101 cw(c130.687,26.284) 131.505,26.284 131.505,25.548 ccw(c132.068,25.548) 132.068,24.984 ccw(c132.068,25.548) 132.632,25.548 132.632,26.284 cw(c133.449,26.284) 133.449,27.101 cw(c133.449,26.284) 134.267,26.284 134.267,25.548 ccw(c134.83,25.548) 134.83,24.984 ccw(c134.83,25.548) 135.394,25.548 135.394,26.284 cw(c136.211,26.284) 136.211,27.101 cw(c136.211,26.284) 137.029,26.284 137.029,25.548 ccw(c137.592,25.548) 137.592,24.984 ccw(c137.592,25.548) 138.156,25.548 138.156,26.083 cw(c138.973,26.083) 138.973,26.901 141.16,26.901 150.391,26.901 158.75,35.259 158.75,37.4 158.236,37.914 157.861,37.914 157.674,37.728 v1(157.6,37.728)
BGA0: D12.6 J8.C3 R90.2 | length 27.1
  Top w0.127: R90.2@186.37,2.1 188.85,2.1 189.175,2.425 D12.6@189.175,2.745 ; D12.6@189.175,3.175 189.201,3.201 189.776,3.201 190.175,3.6 191.925,3.6 193.824,1.701 202.639,1.701 202.893,1.955 210.575,1.955 J8.C3@211.569,2.95
BGA1: D12.4 J8.F3 R91.2 | length 23
  Top w0.127: R91.2@186.37,3.1 187.8,3.1 D12.4@187.875,3.175 187.875,3.841 187.984,3.95 191.99,3.95 193.984,1.955 202.534,1.955 202.788,2.209 206.629,2.209 J8.F3@207.369,2.95
BGA2: D12.3 J8.I3 R94.2 | length 18.9
  Top w0.127: R94.2@186.37,5.45 187.36,5.45 D12.3@187.875,5.45 ; D12.3@187.875,5.375 187.875,4.475 188,4.35 192.081,4.35 194.221,2.209 197.267,2.209 202.429,2.209 J8.I3@203.169,2.95
BGA3: D12.1 J8.L3 R99.2 | length 15
  Top w0.127: R99.2@186.44,6.45 187.225,6.45 187.625,6.85 188.679,6.85 189.175,6.354 189.175,5.1 189.5,4.775 192.927,4.775 194.752,2.95 J8.L3@198.969,2.95
BP_I2C.SCL: D11.3 J8.B2 R121.1 | length 33.4
  Top w0.127: v1(183.725,-0.5) 183.733,-0.492 R121.1@183.733,0.141 ; v1(189.775,1.35) 189.775,1.945 189.98,2.15 D11.3@190.575,2.15
  Bot w0.127: v1(183.725,-0.5) 185.575,1.35 v1(189.775,1.35) 192.595,1.35 194.195,-0.25 211.869,-0.25 J8.B2@213.069,0.95
BP_I2C.SDA: D11.1 J8.C2 R120.1 | length 30.7
  Top w0.127: R120.1@183.733,1.182 v1(183.733,1.9) ; D11.1@191.875,2.15 v1(192.575,2.15)
  Bot w0.127: v1(183.733,1.9) 185.13,1.9 185.38,2.15 v1(192.575,2.15) 194.65,0.075 210.794,0.075 J8.C2@211.669,0.95
BP_IO.LVDS_N0: J8.E3 R138.1 | length 83.3
  Bot w0.127: R138.1@186.33,54.7 185.907,55.123 185.548,55.123 185.09,54.665 185.09,46.313 181.529,42.752 181.529,34.104 177.304,29.879 177.304,14.283 187.437,4.149 193.176,4.149 195.3,2.025 208.891,2.025 209.342,2.476 209.342,2.581 208.973,2.95 J8.E3@208.769,2.95
BP_IO.LVDS_N1: J8.B3 R139.1 | length 76.9
  Top w0.127: v1(201.513,52.437) 201.702,52.625 207.241,52.625 211.102,48.764 211.345,48.52 211.988,47.877 211.988,45.264 ccw(c212.806,45.264) 212.806,44.447 213.719,44.447 cw(c213.719,43.883) 213.719,43.32 211.79,43.32 ccw(c211.79,42.502) 211.79,41.684 213.719,41.684 cw(c213.719,41.121) 213.719,40.558 211.79,40.558 ccw(c211.79,39.74) 211.79,38.922 213.719,38.922 cw(c213.719,38.359) 213.719,37.795 212.806,37.795 ccw(c212.806,36.978) 211.988,36.978 211.988,35.406 211.988,25.154 211.988,24.521 211.988,24.162 215.421,20.729 215.421,4.38 215.095,4.054 213.779,4.054 213.525,3.8 213.525,3.506 J8.B3@212.969,2.95
  Bot w0.127: R139.1@199.77,52.2 200.195,52.625 201.325,52.625 v1(201.513,52.437)
BP_IO.LVDS_N2: J8.C4 R140.1 | length 79.6
  Top w0.127: v1(201.513,47.286) 201.702,47.475 204.95,47.475 209.021,43.404 209.021,41.023 209.021,39.226 cw(c208.458,39.226) 208.458,38.662 207.663,38.662 ccw(c207.663,37.845) 206.845,37.845 ccw(c207.663,37.845) 207.663,37.027 209.458,37.027 cw(c209.458,36.464) 210.021,36.464 cw(c209.458,36.464) 209.458,35.9 207.663,35.9 ccw(c207.663,35.083) 206.845,35.083 ccw(c207.663,35.083) 207.663,34.265 209.458,34.265 cw(c209.458,33.702) 210.021,33.702 cw(c209.458,33.702) 209.458,33.138 207.663,33.138 ccw(c207.663,32.321) 206.845,32.321 ccw(c207.663,32.321) 207.663,31.503 209.458,31.503 cw(c209.458,30.94) 210.021,30.94 cw(c209.458,30.94) 209.458,30.376 207.663,30.376 ccw(c207.663,29.559) 206.845,29.559 ccw(c207.663,29.559) 207.663,28.741 209.458,28.741 cw(c209.458,28.178) 210.021,28.178 cw(c209.458,28.178) 209.458,27.614 207.663,27.614 ccw(c207.663,26.797) 206.845,26.797 ccw(c207.663,26.797) 207.663,25.979 208.458,25.979 cw(c208.458,25.416) 209.021,25.416 209.021,25.225 209.021,24.454 213.725,19.75 213.725,16.774 v1(213.551,16.6)
  Bot w0.127: R140.1@199.77,47.05 200.18,47.46 201.34,47.46 v1(201.513,47.286) ; J8.C4@211.669,4.95 212.217,5.498 212.217,5.817 212.491,6.091 215.209,6.091 215.57,6.452 215.57,13.132 213.721,14.981 213.721,16.43 v1(213.551,16.6)
BP_IO.LVDS_N3: J8.L4 R141.1 | length 82.7
  Bot w0.127: R141.1@186.33,45.6 185.907,45.177 184.893,45.177 182.125,42.409 182.125,33.15 181.488,32.513 181.488,26.767 181.488,25.639 cw(c180.924,25.639) 180.924,25.075 178.852,25.075 ccw(c178.852,24.258) 178.035,24.258 ccw(c178.852,24.258) 178.852,23.44 181.457,23.44 cw(c181.457,22.877) 182.021,22.877 cw(c181.457,22.877) 181.457,22.313 178.852,22.313 ccw(c178.852,21.496) 178.035,21.496 ccw(c178.852,21.496) 178.852,20.678 181.457,20.678 cw(c181.457,20.115) 182.021,20.115 cw(c181.457,20.115) 181.457,19.551 178.852,19.551 ccw(c178.852,18.734) 178.035,18.734 ccw(c178.852,18.734) 178.852,17.916 181.457,17.916 cw(c181.457,17.353) 182.021,17.353 cw(c181.457,17.353) 181.457,16.789 178.852,16.789 ccw(c178.852,15.972) 178.035,15.972 ccw(c178.852,15.972) 178.852,15.154 180.924,15.154 cw(c180.924,14.591) 181.488,14.591 181.488,14.4 181.488,14.258 189.875,5.871 199.195,5.871 199.642,5.424 199.642,5.319 199.273,4.95 J8.L4@199.069,4.95
BP_IO.LVDS_N4: J8.I4 R142.1 | length 78.6
  Top w0.127: v1(193.675,11.975) 193.675,11.901 193.861,11.714 193.861,10.732 193.86,10.73 193.86,9.371 197.405,5.825 203.441,5.825 203.842,5.424 203.842,5.319 203.473,4.95 J8.I4@203.269,4.95
  Bot w0.127: R142.1@186.33,39.4 185.857,39.873 185.237,39.873 184.975,39.61 184.975,33.365 186.834,31.505 189.15,29.19 189.15,28.785 cw(c188.332,28.785) 188.332,27.967 187.282,27.967 ccw(c187.282,27.404) 186.719,27.404 ccw(c187.282,27.404) 187.282,26.84 188.731,26.84 cw(c188.731,26.023) 189.549,26.023 cw(c188.731,26.023) 188.731,25.205 187.282,25.205 ccw(c187.282,24.642) 186.719,24.642 ccw(c187.282,24.642) 187.282,24.078 188.731,24.078 cw(c188.731,23.261) 189.549,23.261 cw(c188.731,23.261) 188.731,22.443 187.282,22.443 ccw(c187.282,21.88) 186.719,21.88 ccw(c187.282,21.88) 187.282,21.316 188.731,21.316 cw(c188.731,20.499) 189.549,20.499 cw(c188.731,20.499) 188.731,19.681 187.282,19.681 ccw(c187.282,19.118) 186.719,19.118 ccw(c187.282,19.118) 187.282,18.554 188.731,18.554 cw(c188.731,17.737) 189.549,17.737 cw(c188.731,17.737) 188.731,16.919 187.282,16.919 ccw(c187.282,16.356) 186.719,16.356 ccw(c187.282,16.356) 187.282,15.792 188.642,15.792 cw(c188.642,14.975) 189.46,14.975 cw(c188.642,14.975) 188.642,14.157 187.282,14.157 ccw(c187.282,13.594) 186.719,13.594 ccw(c187.282,13.594) 187.282,13.03 188.332,13.03 cw(c188.332,12.213) 189.15,12.213 189.15,12.022 189.15,11.657 190.107,10.7 193.529,10.7 193.861,11.032 193.861,11.714 193.675,11.901 v1(193.675,11.975)
BP_IO.LVDS_N5: J8.K5 R143.1 | length 83.1
  Bot w0.127: 197.694,15.499 195.614,17.579 cw(c196.193,18.157) 195.614,18.735 cw(c196.193,18.157) 196.771,18.735 199.984,15.521 ccw(c200.383,15.92) 200.781,15.521 ccw(c200.383,15.92) 200.781,16.318 197.567,19.532 cw(c198.146,20.11) 197.567,20.688 cw(c198.146,20.11) 198.724,20.688 201.937,17.474 ccw(c202.336,17.873) 202.734,17.474 ccw(c202.336,17.873) 202.734,18.271 199.521,21.485 cw(c200.099,22.063) 199.521,22.641 cw(c200.099,22.063) 200.677,22.641 203.89,19.427 ccw(c204.289,19.826) 204.687,19.427 ccw(c204.289,19.826) 204.687,20.224 201.474,23.438 cw(c202.052,24.016) 201.474,24.594 cw(c202.052,24.016) 202.63,24.594 204.71,22.514 ccw(c205.108,22.912) 205.507,22.514 206.946,23.954 206.946,24.228 206.946,34.321 203.831,37.437 200.706,37.437 200.642,37.373 200.071,37.373 199.996,37.299 199.996,37.126 R143.1@199.77,36.9 ; 197.694,15.499 cw(c197.296,15.1) 197.695,14.702 197.56,14.567 197.186,14.193 197.186,8.643 197.993,7.836 200.53,7.836 200.942,7.424 200.942,7.319 200.573,6.95 J8.K5@200.369,6.95
BP_IO.LVDS_N6: J8.H5 R144.1 | length 81.9
  Top w0.127: v1(202.114,31) 202.3,30.813 202.3,30.722 202.296,30.718 202.296,29.597 202.296,27.301 cw(c201.732,27.301) 201.732,26.737 198.296,26.737 ccw(c198.296,25.92) 197.479,25.92 ccw(c198.296,25.92) 198.296,25.102 201.794,25.102 cw(c201.794,24.539) 202.357,24.539 cw(c201.794,24.539) 201.794,23.975 198.296,23.975 ccw(c198.296,23.158) 197.479,23.158 ccw(c198.296,23.158) 198.296,22.34 201.794,22.34 cw(c201.794,21.777) 202.357,21.777 cw(c201.794,21.777) 201.794,21.213 198.296,21.213 ccw(c198.296,20.396) 197.479,20.396 ccw(c198.296,20.396) 198.296,19.578 201.794,19.578 cw(c201.794,19.015) 202.357,19.015 cw(c201.794,19.015) 201.794,18.451 198.296,18.451 ccw(c198.296,17.634) 197.479,17.634 ccw(c198.296,17.634) 198.296,16.816 201.794,16.816 cw(c201.794,16.253) 202.357,16.253 cw(c201.794,16.253) 201.794,15.689 198.296,15.689 ccw(c198.296,14.872) 197.479,14.872 ccw(c198.296,14.872) 198.296,14.054 201.732,14.054 cw(c201.732,13.491) 202.296,13.491 202.296,13.3 202.296,12.455 201.42,11.579 198.375,11.579 197.401,10.605 197.401,8.805 198.371,7.836 204.964,7.836 205.129,7.671 205.129,7.369 204.71,6.95 J8.H5@204.569,6.95
  Bot w0.127: R144.1@199.77,31.9 200.195,32.325 201.925,32.325 202.3,31.95 202.3,31.186 v1(202.114,31)
BP_IO.LVDS_N7: J8.F6 R145.1 | length 78.5
  Top w0.127: v1(205.109,26.775) 205.3,26.584 205.3,24.941 206.036,24.205 208.249,21.991 ccw(c208.827,22.57) 208.827,21.752 210.367,21.752 cw(c210.367,21.189) 210.93,21.189 cw(c210.367,21.189) 210.367,20.625 205.406,20.625 ccw(c205.406,19.808) 204.589,19.808 ccw(c205.406,19.808) 205.406,18.99 211.372,18.99 cw(c211.372,18.427) 211.936,18.427 cw(c211.372,18.427) 211.372,17.863 205.406,17.863 ccw(c205.406,17.046) 204.589,17.046 ccw(c205.406,17.046) 205.406,16.228 211.372,16.228 cw(c211.372,15.665) 211.936,15.665 cw(c211.372,15.665) 211.372,15.101 205.406,15.101 ccw(c205.406,14.284) 204.589,14.284 ccw(c205.406,14.284) 205.406,13.466 211.372,13.466 cw(c211.372,12.903) 211.936,12.903 cw(c211.372,12.903) 211.372,12.339 205.406,12.339 ccw(c205.406,11.522) 204.589,11.522 ccw(c205.406,11.522) 205.406,10.704 207.479,10.704 cw(c207.479,10.141) 208.042,10.141 208.042,9.95 208.042,9.523 J8.F6@207.469,8.95
  Bot w0.127: R145.1@199.77,29.3 200.168,29.698 203.704,29.698 205.27,28.132 205.27,26.936 v1(205.109,26.775)
BP_IO.LVDS_N8: J8.C6 R146.1 | length 80.3
  Bot w0.127: R146.1@180.87,57.7 182.137,58.967 182.902,58.967 184.742,60.808 204.633,60.808 212.242,53.199 212.242,51.764 212.242,11.5 212.242,9.523 J8.C6@211.669,8.95
BP_IO.LVDS_N9: J8.L6 R147.1 | length 80
  Bot w0.127: R147.1@180.87,55.2 181.273,55.603 182.313,55.603 182.944,56.235 182.944,57.049 184.695,58.8 202.841,58.8 208.407,53.234 208.407,50.78 208.407,35.9 208.407,20.422 199.644,11.659 199.644,9.525 J8.L6@199.069,8.95
BP_IO.LVDS_N10: J8.I6 R148.1 | length 78.6
  Top w0.127: J8.I6@203.269,8.95 203.842,9.523 203.842,38.72 v1(203.649,38.913)
  Bot w0.127: R148.1@180.87,47.1 181.291,47.521 182.13,47.521 182.754,48.145 182.754,54.845 185.406,57.497 201.219,57.497 203.835,54.881 203.835,51.007 203.835,40.55 203.835,39.1 v1(203.649,38.913)
BP_IO.LVDS_N11: J9.E1 R149.1 | length 79.8
  Bot w0.127: R149.1@167.674,42 167.199,42.475 166.008,42.475 164.948,43.536 164.948,47.064 170.028,52.144 170.028,56.687 173.941,60.6 181.7,60.6 182.725,61.625 182.86,61.76 ccw(c182.545,62.074) 182.86,62.388 182.724,62.524 cw(c183.217,63.019) 182.723,63.513 cw(c183.217,63.019) 183.671,63.55 183.674,63.55 184.801,62.422 ccw(c185.116,62.737) 185.43,62.422 ccw(c185.116,62.737) 185.43,63.051 ; 185.429,63.052 184.34,64.14 cw(c184.834,64.635) 184.34,65.129 cw(c184.834,64.635) 185.287,65.166 185.29,65.166 186.418,64.039 ccw(c186.732,64.353) 187.047,64.039 ccw(c186.732,64.353) 187.046,64.667 ; 187.046,64.668 186.111,65.603 cw(c186.605,66.097) 186.111,66.591 cw(c186.605,66.097) 187.099,66.591 187.889,65.801 ccw(c188.203,66.115) 188.517,65.801 ccw(c188.203,66.115) 188.517,66.43 ; 188.517,66.43 cw(c189.011,66.923) 188.517,67.417 192.855,71.755 192.901,71.755 208.305,71.755 209.352,72.801 209.352,75.367 J9.E1@208.769,75.95
BP_IO.LVDS_N12: J9.B1 R150.1 | length 78.2
  Top w0.127: v1(206.375,73.891) 206.555,73.711 212.666,73.711 213.538,74.583 213.538,75.381 J9.B1@212.969,75.95
  Bot w0.127: R150.1@167.674,39.5 167.27,39.903 165.305,39.903 163.621,41.587 163.621,47.943 168.554,52.876 168.554,57.639 173.616,62.7 179.7,62.7 180.643,63.643 180.778,63.778 ccw(c180.463,64.092) 180.778,64.406 180.719,64.465 cw(c181.213,64.959) 180.719,65.452 cw(c181.213,64.959) 181.707,65.452 181.746,65.414 181.765,65.394 ccw(c182.08,65.708) 182.394,65.394 189.975,72.975 190.711,73.711 206.195,73.711 v1(206.375,73.891)
BP_IO.LVDS_N13: J9.K1
BP_IO.LVDS_N14: J9.H1
BP_IO.LVDS_N15: J8.F2
BP_IO.LVDS_P0: J8.D3 R122.1 | length 84.6
  Bot w0.127: R122.1@186.33,55.8 185.907,55.377 185.443,55.377 184.836,54.77 184.836,46.418 181.275,42.857 181.275,34.209 177.05,29.984 177.05,14.178 187.332,3.895 193.07,3.895 195.195,1.771 208.996,1.771 209.596,2.371 209.596,2.581 209.965,2.95 J8.D3@210.169,2.95
BP_IO.LVDS_P1: J8.A3 R123.1 | length 77.4
  Top w0.127: v1(201.513,53.064) 201.698,52.879 207.346,52.879 211.461,48.764 211.525,48.7 212.242,47.983 212.242,45.264 ccw(c212.806,45.264) 212.806,44.701 213.719,44.701 cw(c213.719,43.883) 213.719,43.066 211.79,43.066 ccw(c211.79,42.502) 211.79,41.939 213.719,41.939 cw(c213.719,41.121) 213.719,40.303 211.79,40.303 ccw(c211.79,39.74) 211.79,39.176 213.719,39.176 cw(c213.719,38.359) 213.719,37.541 212.806,37.541 ccw(c212.806,36.978) 212.242,36.978 212.242,35.406 212.242,24.521 212.242,24.267 215.675,20.834 215.675,4.275 215.2,3.8 213.884,3.8 213.779,3.695 213.779,3.54 J8.A3@214.369,2.95
  Bot w0.127: R123.1@199.77,53.3 200.191,52.879 201.329,52.879 v1(201.513,53.064)
BP_IO.LVDS_P2: J8.B4 R124.1 | length 80.1
  Top w0.127: v1(201.513,47.913) 201.698,47.729 205.055,47.729 209.275,43.509 209.275,41.023 209.275,39.226 cw(c208.458,39.226) 208.458,38.408 207.663,38.408 ccw(c207.663,37.845) 207.099,37.845 ccw(c207.663,37.845) 207.663,37.281 209.458,37.281 cw(c209.458,36.464) 210.275,36.464 cw(c209.458,36.464) 209.458,35.646 207.663,35.646 ccw(c207.663,35.083) 207.099,35.083 ccw(c207.663,35.083) 207.663,34.519 209.458,34.519 cw(c209.458,33.702) 210.275,33.702 cw(c209.458,33.702) 209.458,32.884 207.663,32.884 ccw(c207.663,32.321) 207.099,32.321 ccw(c207.663,32.321) 207.663,31.757 209.458,31.757 cw(c209.458,30.94) 210.275,30.94 cw(c209.458,30.94) 209.458,30.122 207.663,30.122 ccw(c207.663,29.559) 207.099,29.559 ccw(c207.663,29.559) 207.663,28.995 209.458,28.995 cw(c209.458,28.178) 210.275,28.178 cw(c209.458,28.178) 209.458,27.36 207.663,27.36 ccw(c207.663,26.797) 207.099,26.797 ccw(c207.663,26.797) 207.663,26.233 208.458,26.233 cw(c208.458,25.416) 209.275,25.416 209.275,25.225 209.275,24.559 214.004,19.83 214.004,16.774 v1(214.178,16.6)
  Bot w0.127: R124.1@199.77,48.15 200.18,47.74 201.34,47.74 v1(201.513,47.913) ; J8.B4@213.069,4.95 212.471,5.548 212.471,5.711 212.596,5.837 215.314,5.837 215.824,6.346 215.824,13.237 213.975,15.086 213.975,16.397 v1(214.178,16.6)
BP_IO.LVDS_P3: J8.K4 R125.1 | length 82.2
  Bot w0.127: R125.1@186.33,44.5 185.907,44.923 184.998,44.923 182.379,42.304 182.379,33.045 181.742,32.407 181.742,26.767 181.742,25.639 cw(c180.924,25.639) 180.924,24.821 178.852,24.821 ccw(c178.852,24.258) 178.289,24.258 ccw(c178.852,24.258) 178.852,23.694 181.457,23.694 cw(c181.457,22.877) 182.275,22.877 cw(c181.457,22.877) 181.457,22.059 178.852,22.059 ccw(c178.852,21.496) 178.289,21.496 ccw(c178.852,21.496) 178.852,20.932 181.457,20.932 cw(c181.457,20.115) 182.275,20.115 cw(c181.457,20.115) 181.457,19.297 178.852,19.297 ccw(c178.852,18.734) 178.289,18.734 ccw(c178.852,18.734) 178.852,18.17 181.457,18.17 cw(c181.457,17.353) 182.275,17.353 cw(c181.457,17.353) 181.457,16.535 178.852,16.535 ccw(c178.852,15.972) 178.289,15.972 ccw(c178.852,15.972) 178.852,15.408 180.924,15.408 cw(c180.924,14.591) 181.742,14.591 181.742,14.4 181.742,14.364 189.98,6.125 199.3,6.125 199.896,5.529 199.896,5.319 200.265,4.95 J8.K4@200.469,4.95
BP_IO.LVDS_P4: J8.H4 R126.1 | length 79.9
  Top w0.127: v1(194.302,11.975) 194.302,11.901 194.115,11.714 194.115,10.627 194.114,10.625 194.114,9.476 197.51,6.079 203.546,6.079 204.096,5.529 204.096,5.319 204.465,4.95 J8.H4@204.669,4.95
  Bot w0.127: R126.1@186.33,40.6 185.857,40.127 185.132,40.127 184.721,39.716 184.721,33.259 186.475,31.505 188.896,29.084 188.896,28.785 cw(c188.332,28.785) 188.332,28.221 187.282,28.221 ccw(c187.282,27.404) 186.465,27.404 ccw(c187.282,27.404) 187.282,26.586 188.731,26.586 cw(c188.731,26.023) 189.295,26.023 cw(c188.731,26.023) 188.731,25.459 187.282,25.459 ccw(c187.282,24.642) 186.465,24.642 ccw(c187.282,24.642) 187.282,23.824 188.731,23.824 cw(c188.731,23.261) 189.295,23.261 cw(c188.731,23.261) 188.731,22.697 187.282,22.697 ccw(c187.282,21.88) 186.465,21.88 ccw(c187.282,21.88) 187.282,21.062 188.731,21.062 cw(c188.731,20.499) 189.295,20.499 cw(c188.731,20.499) 188.731,19.935 187.282,19.935 ccw(c187.282,19.118) 186.465,19.118 ccw(c187.282,19.118) 187.282,18.3 188.731,18.3 cw(c188.731,17.737) 189.295,17.737 cw(c188.731,17.737) 188.731,17.173 187.282,17.173 ccw(c187.282,16.356) 186.465,16.356 ccw(c187.282,16.356) 187.282,15.538 188.642,15.538 cw(c188.642,14.975) 189.206,14.975 cw(c188.642,14.975) 188.642,14.411 187.282,14.411 ccw(c187.282,13.594) 186.465,13.594 ccw(c187.282,13.594) 187.282,12.776 188.332,12.776 cw(c188.332,12.213) 188.896,12.213 188.896,12.022 188.896,11.552 190.002,10.446 193.634,10.446 194.115,10.927 194.115,11.714 194.302,11.901 v1(194.302,11.975)
BP_IO.LVDS_P5: J8.J5 R127.1 | length 83.5
  Bot w0.127: R127.1@199.77,38.1 199.996,37.874 199.996,37.701 200.071,37.627 200.537,37.627 200.601,37.691 203.936,37.691 207.2,34.426 207.2,23.974 207.2,23.848 205.686,22.334 cw(c205.108,22.912) 204.53,22.334 202.45,24.414 ccw(c202.052,24.016) 201.653,24.414 ccw(c202.052,24.016) 201.653,23.617 204.867,20.404 cw(c204.289,19.826) 204.867,19.248 cw(c204.289,19.826) 203.711,19.248 200.497,22.461 ccw(c200.099,22.063) 199.7,22.461 ccw(c200.099,22.063) 199.7,21.664 202.914,18.451 cw(c202.336,17.873) 202.914,17.295 cw(c202.336,17.873) 201.757,17.295 198.544,20.508 ccw(c198.146,20.11) 197.747,20.508 ccw(c198.146,20.11) 197.747,19.711 200.961,16.498 cw(c200.383,15.92) 200.961,15.342 cw(c200.383,15.92) 199.804,15.342 196.591,18.555 ccw(c196.193,18.157) 195.794,18.555 ccw(c196.193,18.157) 195.794,17.758 197.874,15.678 cw(c197.296,15.1) 197.875,15.677 197.911,15.641 197.911,15.638 cw(c197.296,15.1) 197.874,14.522 197.739,14.387 197.44,14.088 197.44,8.748 198.099,8.09 200.636,8.09 201.196,7.529 201.196,7.319 201.565,6.95 J8.J5@201.769,6.95
BP_IO.LVDS_P6: J8.G5 R128.1 | length 82.4